# EAGLE board CT_schematic (EAGLE 7.6.0)

Size 100 x 80 mm. Coordinates in mm from the lower left corner, seen from the top.
Outline: 0,0 100,0 100,80 0,80 0,0
Copper layers (1*16): Top 0.035mm / dielectric 1.5mm / Bottom 0.035mm
Design rules "default": minimum track width 10mil, minimum drill 24mil, track to track 8mil, track to pad 8mil, pad to pad 8mil, via to via 8mil, smd to smd 8mil, copper to edge 40mil, drill to drill 8mil, minimum pad ring 10mil, minimum via ring 8mil, stop-mask expansion 4mil, vias tented up to drill 0mil, thermal gap 10mil

## Footprints (pad centres in the part's own frame; a part is rotated, then mirrored left to right if it is on the bottom)
C0603 = smd 0.8 x 0.8: 1 -0.762,0; 2 0.762,0
C0402 = smd 0.5 x 0.5: 1 -0.508,0; 2 0.508,0
EXV-9B = smd 2.718 x 1.778: 1 -2.108,0; 2 2.108,0
EXV-9H = smd 3.505 x 1.676: 1 -2.857,0; 2 2.857,0
L0603 = smd 0.8 x 0.8: 1 -0.762,0; 2 0.762,0
PJ-037B_PACKAGE = drill 3.7 square: 1 12,0 | drill 3.2 square: 2 6,0
R0603 = smd 0.8 x 0.8: 1 -0.762,0; 2 0.762,0
TFBGA64 = smd 0.35 x 0.35: A1 -1.75,1.75; A2 -1.25,1.75; A3 -0.75,1.75; A4 -0.25,1.75; A5 0.25,1.75; A6 0.75,1.75; A7 1.25,1.75; A8 1.75,1.75; B1 -1.75,1.25; B2 -1.25,1.25; B3 -0.75,1.25; B4 -0.25,1.25; B5 0.25,1.25; B6 0.75,1.25; B7 1.25,1.25; B8 1.75,1.25; C1 -1.75,0.75; C2 -1.25,0.75; C3 -0.75,0.75; C4 -0.25,0.75; C5 0.25,0.75; C6 0.75,0.75; C7 1.25,0.75; C8 1.75,0.75; D1 -1.75,0.25; D2 -1.25,0.25; D3 -0.75,0.25; D4 -0.25,0.25; D5 0.25,0.25; D6 0.75,0.25; D7 1.25,0.25; D8 1.75,0.25; E1 -1.75,-0.25; E2 -1.25,-0.25; E3 -0.75,-0.25; E4 -0.25,-0.25; E5 0.25,-0.25; E6 0.75,-0.25; E7 1.25,-0.25; E8 1.75,-0.25; F1 -1.75,-0.75; F2 -1.25,-0.75; F3 -0.75,-0.75; F4 -0.25,-0.75; F5 0.25,-0.75; F6 0.75,-0.75; F7 1.25,-0.75; F8 1.75,-0.75; G1 -1.75,-1.25; G2 -1.25,-1.25; G3 -0.75,-1.25; G4 -0.25,-1.25; G5 0.25,-1.25; G6 0.75,-1.25; G7 1.25,-1.25; G8 1.75,-1.25; H1 -1.75,-1.75; H2 -1.25,-1.75; H3 -0.75,-1.75; H4 -0.25,-1.75; H5 0.25,-1.75; H6 0.75,-1.75; H7 1.25,-1.75; H8 1.75,-1.75
SOIC-8 = smd 1.6 x 0.6: 1 -2.7,1.905 | smd 1.55 x 0.6: 2 -2.7,0.635; 3 -2.7,-0.635; 4 -2.7,-1.905; 5 2.7,-1.905; 6 2.7,-0.635; 7 2.7,0.635; 8 2.7,1.905
TDFN-8/6MM = smd 0.3 x 0.75: 1 0,0; 2 0.5,0; 3 1,0; 4 1.5,0; 5 1.5,3; 6 1,3; 7 0.5,3; 8 0,3
DFN-6 = smd 0.805 x 0.3: 1 -0.952,0.5; 2 -0.952,0; 3 -0.952,-0.5; 4 0.952,-0.5; 5 0.952,0; 6 0.952,0.5 | smd 0.61 x 1.42: 7 0,0
ASEK = smd 1.4 x 1: 1 -1.1,-0.8; 2 1.1,-0.8; 3 1.1,0.8; 4 -1.1,0.8
ASFL1 = smd 1.7 x 1.5: 1 -1.27,-1.1; 2 1.27,-1.1; 3 1.27,1.1; 4 -1.27,1.1
LP2954 = smd 1.6 x 0.6: 1 -2.475,1.905 | smd 1.55 x 0.6: 2 -2.475,0.635; 3 -2.475,-0.635; 4 -2.475,-1.905; 5 2.475,-1.905; 6 2.475,-0.635; 7 2.475,0.635; 8 2.475,1.905
SON-6 = smd 0.55 x 0.3: 1 -0.355,0.5 | smd 0.52 x 0.3: 2 -0.37,0; 3 -0.37,-0.5; 4 0.37,-0.5; 5 0.37,0; 6 0.37,0.5
SW_4-1437565-2 = smd 1.4 x 2.1: 1 -2.23,4.55; 2 -2.23,-4.55; 3 2.23,4.55; 4 2.23,-4.55
LGM67K-G1J2-24-Z = smd 0.8 x 1.4: A -2,0; C 0,0
NC7SZ125M5X = smd 1.3 x 0.7: 1 -1.3,0.95; 2 -1.3,0; 3 -1.3,-0.95; 4 1.3,-0.95; 5 1.3,0.95

## Placement (x,y rotation side)
C1  1e-07  [C0603]  -22.86,57.15 0 top  (outside the outline)
C2  1e-07  [C0603]  -26.67,57.15 0 top  (outside the outline)
C3  1e-07  [C0603]  -30.48,57.15 0 top  (outside the outline)
C4  1e-07  [C0603]  -34.29,57.15 0 top  (outside the outline)
C5  4.7e-06  [C0603]  -19.05,57.15 0 top  (outside the outline)
C6  1e-07  [C0603]  -38.1,57.15 0 top  (outside the outline)
C7  1e-08  [C0603]  -41.91,57.15 0 top  (outside the outline)
C8  1e-06  [C0603]  -45.72,57.15 0 top  (outside the outline)
C9  1e-08  [C0402]  -34.29,62.23 0 top  (outside the outline)
C10  1e-08  [C0402]  -38.1,62.23 0 top  (outside the outline)
C11  1e-07  [C0402]  -41.91,62.23 0 top  (outside the outline)
C12  1e-08  [C0402]  -45.72,62.23 0 top  (outside the outline)
C13  1e-08  [C0402]  -49.53,62.23 0 top  (outside the outline)
C14  1e-06  [EXV-9B]  -30.48,44.45 0 top  (outside the outline)
C15  2.2e-06  [EXV-9B]  -39.37,44.45 0 top  (outside the outline)
C16  1e-07  [C0402]  -53.34,62.23 0 top  (outside the outline)
C17  0.0001  [EXV-9H]  -38.1,38.1 0 top  (outside the outline)
C18  0.0001  [EXV-9H]  -49.53,38.1 0 top  (outside the outline)
C19  1e-08  [C0402]  -57.15,62.23 0 top  (outside the outline)
F1  240.0  [L0603]  -49.53,57.15 0 top  (outside the outline)
J1  PJ-037B  [PJ-037B_PACKAGE]  -27.94,7.62 0 top  (outside the outline)
R2  1000.0  [R0603]  -53.34,57.15 0 top  (outside the outline)
R4  4700.0  [R0603]  -57.15,57.15 0 top  (outside the outline)
R5  2200.0  [R0603]  -15.24,62.23 0 top  (outside the outline)
R6  2200.0  [R0603]  -19.05,62.23 0 top  (outside the outline)
R7  2200.0  [R0603]  -22.86,62.23 0 top  (outside the outline)
R8  2200.0  [R0603]  -26.67,62.23 0 top  (outside the outline)
R9  10000.0  [R0603]  -35.56,52.07 0 top  (outside the outline)
R10  10000.0  [R0603]  -40.64,52.07 0 top  (outside the outline)
R11  10000.0  [R0603]  -45.72,52.07 0 top  (outside the outline)
R12  10000.0  [R0603]  -50.8,52.07 0 top  (outside the outline)
R13  100000.0  [R0603]  -59.69,44.45 0 top  (outside the outline)
R14  100000.0  [R0603]  -15.24,52.07 0 top  (outside the outline)
R15  164658.62  [R0603]  -54.61,44.45 0 top  (outside the outline)
R16  100000.0  [R0603]  -20.32,52.07 0 top  (outside the outline)
R17  10000.0  [R0603]  -55.88,52.07 0 top  (outside the outline)
R18  10000.0  [R0603]  -15.24,57.15 0 top  (outside the outline)
R19  9100.0  [R0603]  -30.48,62.23 0 top  (outside the outline)
R20  680000.0  [R0603]  -25.4,52.07 0 top  (outside the outline)
R21  120000.0  [R0603]  -30.48,52.07 0 top  (outside the outline)
U1  STM32L071RBH6  [TFBGA64]  -25.4,19.05 0 top  (outside the outline)
U2  AT25128B-SSHL-T  [SOIC-8]  -24.13,29.21 0 top  (outside the outline)
U3  24AA04-I/MC  [TDFN-8/6MM]  -58.42,3.81 0 top  (outside the outline)
U4  SI7006-A20-IM  [DFN-6]  -15.24,66.04 0 top  (outside the outline)
U5  ASEK-32.768KHz-ECST  [ASEK]  -29.21,38.1 0 top  (outside the outline)
U6  ASFL1-25MHZ-NCS  [ASFL1]  -41.91,29.21 0 top  (outside the outline)
U7  LP2954AIMX/NOPB  [LP2954]  -41.91,19.05 0 top  (outside the outline)
U8  TPS3895ADRYR  [SON-6]  -17.78,66.04 0 top  (outside the outline)
U9  4-1437565-2  [SW_4-1437565-2]  -44.45,6.35 0 top  (outside the outline)
U10  Q65110A2395  [LGM67K-G1J2-24-Z]  -17.78,45.72 0 top  (outside the outline)
U11  nc7sz125m5x  [NC7SZ125M5X]  -46.99,44.45 0 top  (outside the outline)

## Library data of the parts
C1-C19 F1 J1 R2 R4-R21 U1-U11 = circuit_tree

## Nets
CLK_U1_A1: U1.A1 U5.3
CLK_U1_C1: U1.C1 U6.3
GND: C1.2 C2.2 C3.2 C4.2 C5.2 C6.2 C7.2 C8.2 C9.2 C10.2 C11.2 C12.2 C13.2 C14.2 C15.2 C16.2 C17.2 C18.2 C19.2 J1.2 R2.2 R9.2 R16.2 R19.2 R21.2 U1.C2 U1.D4 U1.D5 U1.D6 U1.F1 U2.4 U3.4 U4.2 U4.7 U5.2 U6.2 U7.4 U8.2 U10.C U11.1 U11.3
NET_U1_A3: R6.1 U1.A3 U4.1
NET_U1_B3: R5.1 U1.B3 U4.6
NET_U1_B4: R9.1 U1.B4
NET_U1_E1: R4.1 U1.E1 U11.4
NET_U1_F8: R8.1 U1.F8 U3.5
NET_U1_G7: R7.1 U1.G7 U3.6
NET_U1_H1: C7.1 C8.1 F1.1 U1.G1 U1.H1
NET_U1_H7: U10.A
NET_U1_H8: U9.3 U9.4
NET_U2_3: R10.1 U2.3
NET_U2_7: R12.1 U2.7
NET_U7_3: R14.1 U7.3
NET_U7_5: R13.1 U7.5
NET_U7_7: R15.2 R16.1 U7.7
NET_U8_1: R18.1 R19.1 U8.1
NET_U8_3: R20.2 R21.1 U8.3
NET_U8_4: R17.1 U8.4 U11.2
NET_U9_1: R2.1 U9.1 U9.2
PROC_SPI1_MISO: U1.A4 U2.2
PROC_SPI1_MOSI: U1.B8 U2.5
PROC_SPI1_NSS: R11.1 U1.A6 U2.1
PROC_SPI1_SCK: U1.A5 U2.6
VCC_S1_16V8: C14.1 C17.1 C18.1 J1.1 R14.2 U7.8
VCC_TIER1_3V3: C1.1 C2.1 C3.1 C4.1 C5.1 C6.1 C9.1 C10.1 C11.1 C12.1 C13.1 C15.1 C16.1 C19.1 F1.2 R4.2 R5.2 R6.2 R7.2 R8.2 R10.2 R11.2 R12.2 R13.2 R15.1 R17.2 R18.2 R20.1 U1.B2 U1.D2 U1.E4 U1.E5 U1.E6 U2.8 U3.7 U3.8 U4.5 U5.4 U6.4 U7.1 U8.6 U11.5

## Tracks (layer width: path | path; a pad name or v marks a point on that pad's centre or on a via)
CLK_U1_A1  (1 unrouted)
CLK_U1_C1  (1 unrouted)
GND  (40 unrouted)
NET_U1_A3  (2 unrouted)
NET_U1_B3  (2 unrouted)
NET_U1_B4  (1 unrouted)
NET_U1_E1  (2 unrouted)
NET_U1_F8  (2 unrouted)
NET_U1_G7  (2 unrouted)
NET_U1_H1  (4 unrouted)
NET_U1_H8  (1 unrouted)
NET_U2_3  (1 unrouted)
NET_U2_7  (1 unrouted)
NET_U7_3  (1 unrouted)
NET_U7_5  (1 unrouted)
NET_U7_7  (2 unrouted)
NET_U8_1  (2 unrouted)
NET_U8_3  (2 unrouted)
NET_U8_4  (2 unrouted)
NET_U9_1  (2 unrouted)
PROC_SPI1_MISO  (1 unrouted)
PROC_SPI1_MOSI  (1 unrouted)
PROC_SPI1_NSS  (2 unrouted)
PROC_SPI1_SCK  (1 unrouted)
VCC_S1_16V8  (5 unrouted)
VCC_TIER1_3V3  (41 unrouted)